# EAGLE board Garoa_Dojo_Shield (EAGLE 6.2)
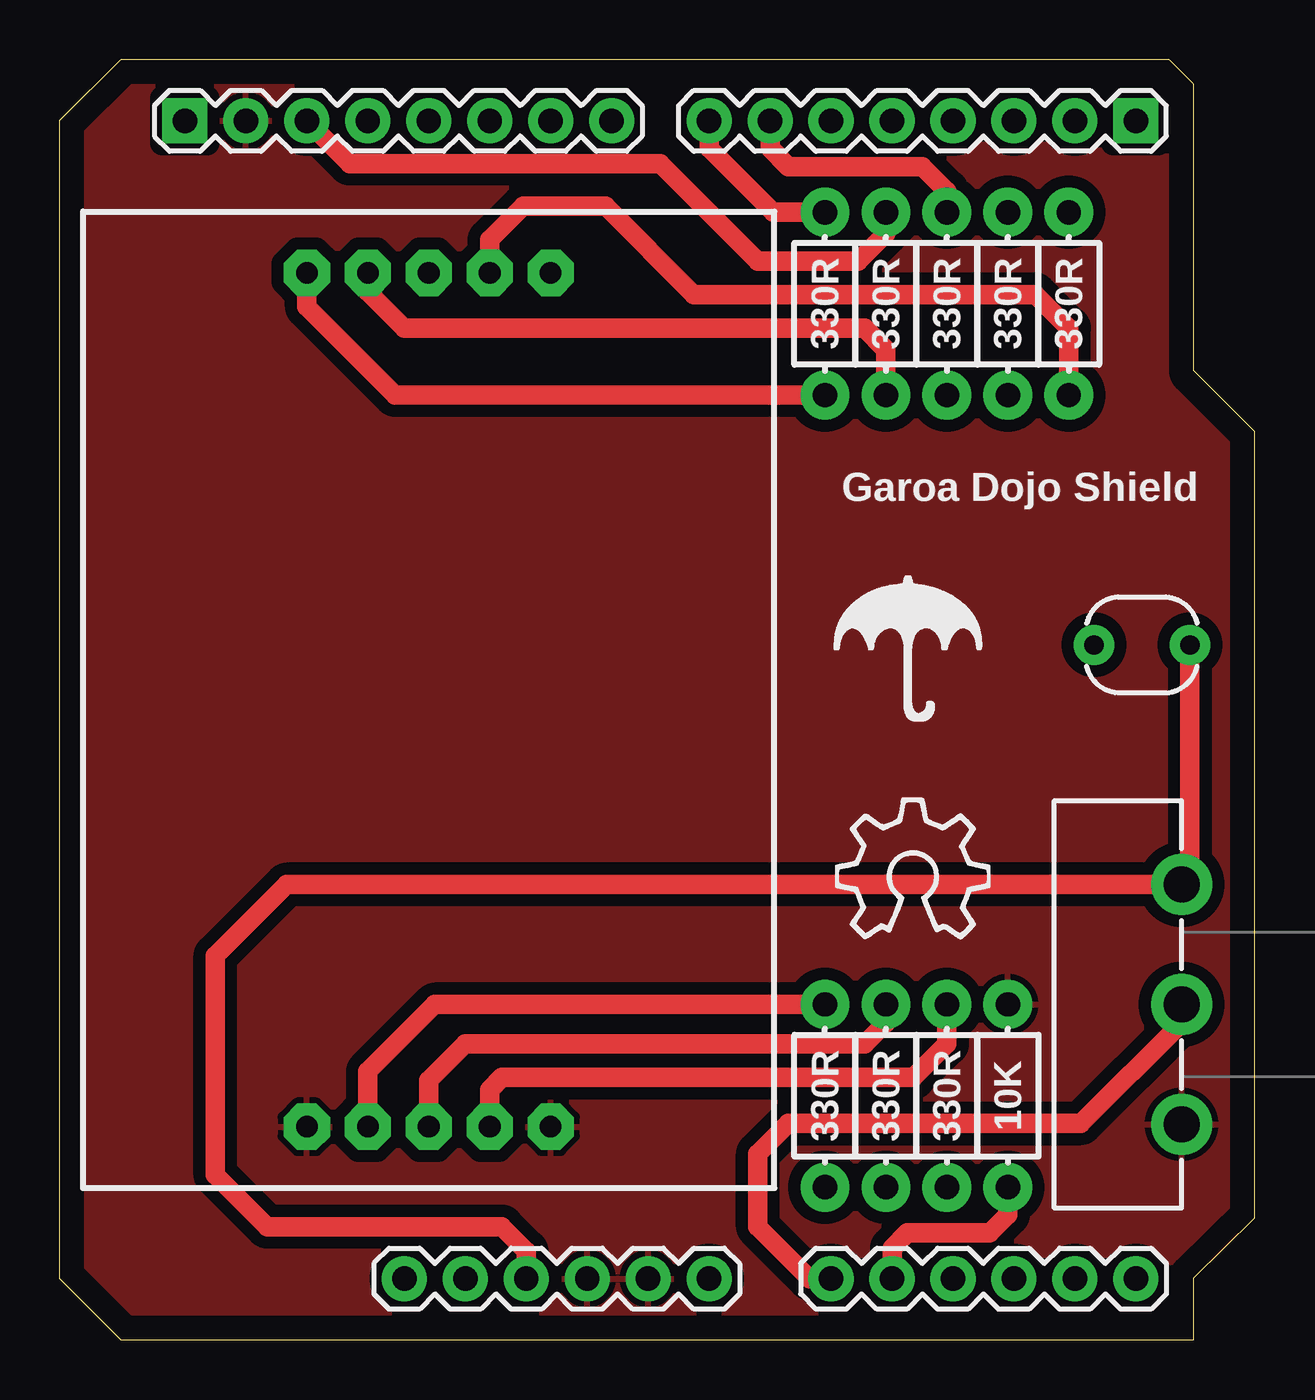
[diagram p0: board, top side]
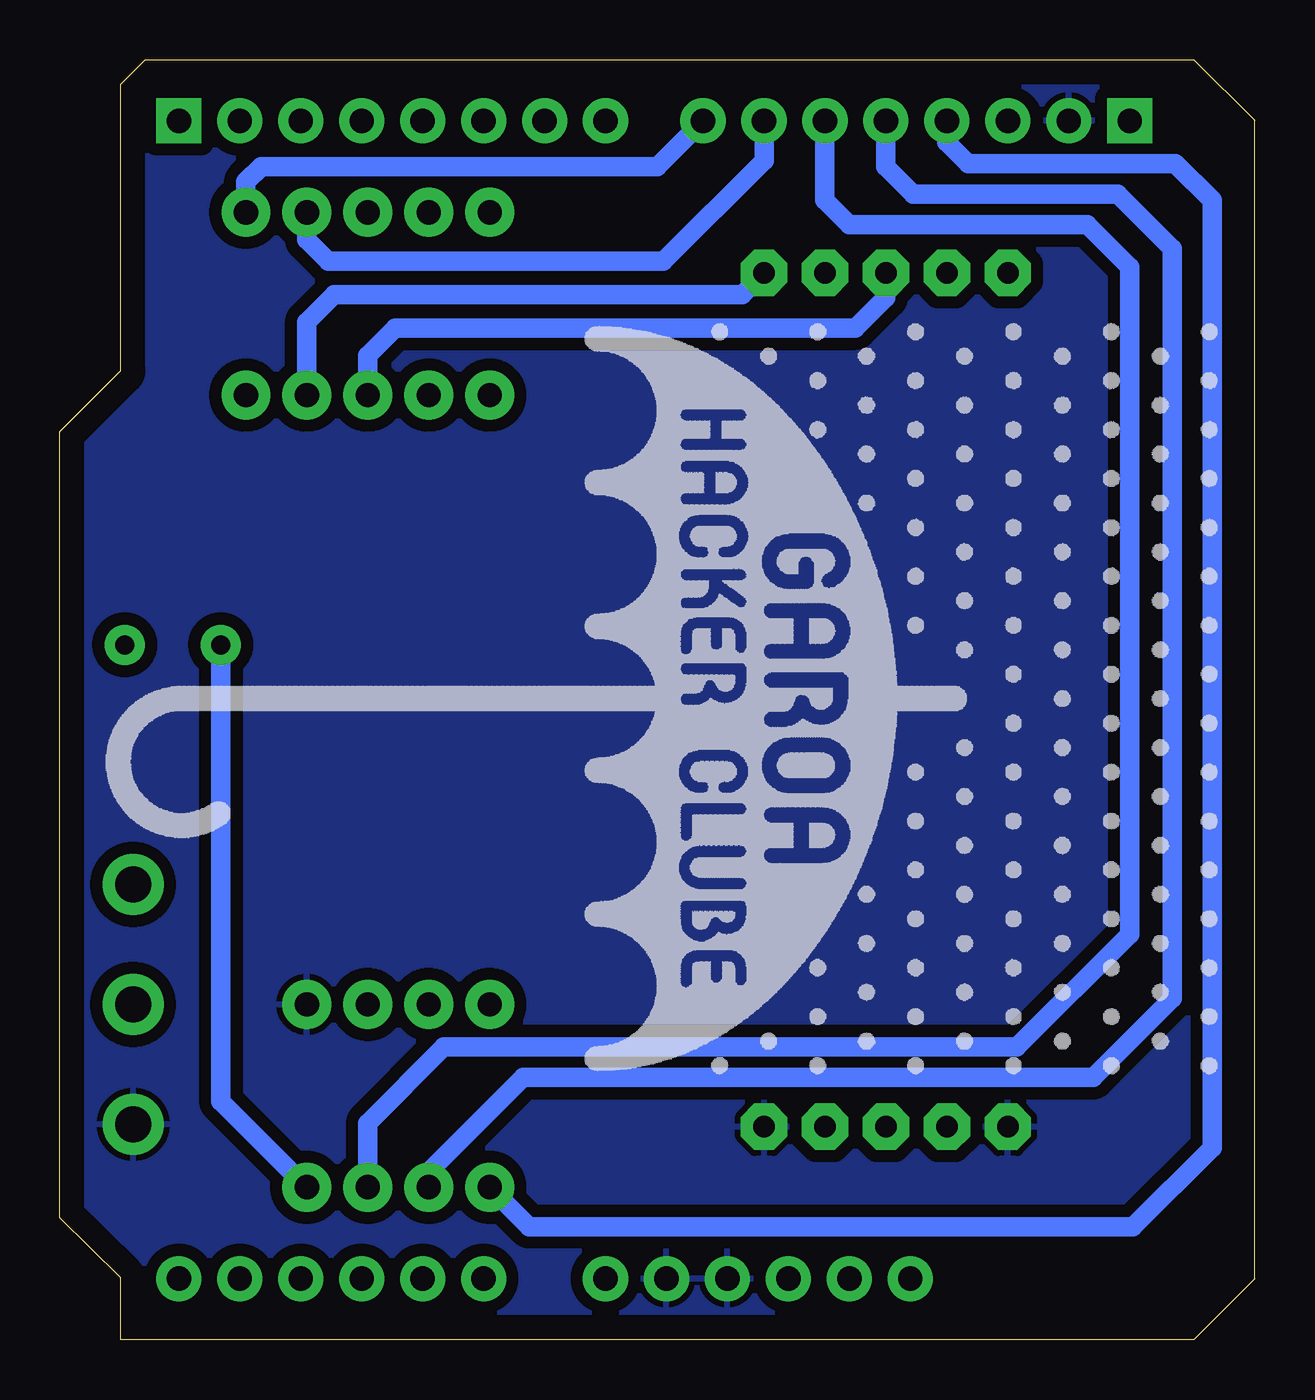
[diagram p1: board, bottom side, seen from below]

Size 49.78 x 53.34 mm. Coordinates in mm from the lower left corner, seen from the top.
Outline: 47.24,0 47.24,2.56 49.78,5.08 49.78,37.85 47.24,40.39 47.24,52.32 46.23,53.34 2.54,53.34 0,50.83 0,2.54 2.54,0 47.24,0
Copper layers (1*16): Top 0.035mm / dielectric 1.5mm / Bottom 0.035mm
Design rules: minimum track width 10mil, minimum drill 24mil, track to track 8mil, track to pad 8mil, pad to pad 8mil, via to via 8mil, smd to smd 8mil, copper to edge 40mil, drill to drill 8mil, minimum pad ring 10mil, minimum via ring 8mil, stop-mask expansion 4mil, vias tented up to drill 0mil, thermal gap 10mil

## Footprints (pad centres in the part's own frame; a part is rotated, then mirrored left to right if it is on the bottom)
1X06 = drill 1.016 pad 1.88: 1 0,0; 2 2.54,0; 3 5.08,0; 4 7.62,0; 5 10.16,0; 6 12.7,0
1X08 = drill 1.016 pad 1.88 square: 1 0,0 | drill 1.016 pad 1.88: 2 2.54,0; 3 5.08,0; 4 7.62,0; 5 10.16,0; 6 12.7,0; 7 15.24,0; 8 17.78,0
PHOTOCELL = drill 0.8 pad 1.676: 1 -2,0; 2 2,0
AXIAL-0.3-KIT = drill 1.016 pad 2.032: P$1 -3.81,0; P$2 3.81,0
POT_ALPHA_RV16AF-20 = drill 1.5 pad 2.54: 1 -5,0; 2 0,0; 3 5,0
7SEG-CODINGDOJO = drill 0.9 pad 1.93 octagon: A 2.54,17.8; B 5.08,17.8; C 2.54,-17.8; D 0,-17.8; DP 0,17.8; E -2.54,-17.8; F -2.54,17.8; G -5.08,17.8; GNDDIR 5.08,-17.8; GNDESQ -5.08,-17.8

## Placement (x,y rotation side)
AD  [1X06]  32.13,2.54 0 top
AD1  [1X06]  14.35,2.54 0 top
IOL  [1X08]  44.83,50.8 180 top
JP1  [1X08]  5.21,50.8 0 top
R1  LDR  [PHOTOCELL]  45.09,28.96 0 top
R2  330R  [AXIAL-0.3-KIT]  31.88,43.18 90 top
R3  330R  [AXIAL-0.3-KIT]  34.42,43.18 90 top
R4  330R  [AXIAL-0.3-KIT]  36.96,43.18 90 top
R5  330R  [AXIAL-0.3-KIT]  42.04,43.18 90 top
R6  330R  [AXIAL-0.3-KIT]  39.5,43.18 90 top
R7  330R  [AXIAL-0.3-KIT]  36.96,10.16 90 top
R8  330R  [AXIAL-0.3-KIT]  34.42,10.16 90 top
R9  330R  [AXIAL-0.3-KIT]  31.88,10.16 90 top
R10  100K  [AXIAL-0.3-KIT]  39.5,10.16 90 top
U$1  10K  [POT_ALPHA_RV16AF-20]  46.74,13.97 90 top
U$2  7SEG-CODINGDOJO  [7SEG-CODINGDOJO]  15.37,26.67 0 top
U$3  [LDG-15MM]  15.37,4.57 0 top

## Library data of the parts
AD AD1 IOL = SparkFun
JP1 = SparkFun-Connectors
R1 = SparkFun-Sensors
R2-R10 = SparkFun-Resistors
U$1 = SparkFun-Electromechanical
U$2 = 7segCodingDojo
U$3 = LdG-library

## Nets
+3.3V: AD1.2
A0/POT: AD.1 U$1.2
A1/LDR: AD.2 R1.1 R10.P$1
A2: AD.3
A3: AD.4
A4: AD.5
A5: AD.6
D0: IOL.1
D1: IOL.2
D2: IOL.3
D3: IOL.4
D4: IOL.5
D5: IOL.6
D6/DP: IOL.7 R4.P$2
D7/G: IOL.8 R2.P$2
D8/A: JP1.8 R5.P$2
D9/B: JP1.7 R6.P$2
D10/C: JP1.6 R7.P$1
D11/D: JP1.5 R8.P$1
D12/E: JP1.4 R9.P$1
D13/F: JP1.3 R3.P$2
GND: AD1.4 AD1.5 JP1.2 R10.P$2 U$1.1 U$2.GNDDIR U$2.GNDESQ
N$2: R9.P$2 U$2.E
N$3: R8.P$2 U$2.D
N$4: R7.P$2 U$2.C
N$5: R2.P$1 U$2.G
N$7: R3.P$1 U$2.F
N$8: R4.P$1 U$2.DP
N$9: R5.P$1 U$2.A
N$10: R6.P$1 U$2.B
RST: AD1.1
VCC: AD1.3 R1.2 U$1.3
VIN: AD1.6

## Tracks (layer width: path | path; a pad name or v marks a point on that pad's centre or on a via)
A0/POT
  Top 0.813: AD.1 31.24,2.54 29.08,4.7 29.08,7.75 30.35,9.02 42.55,9.02 46.74,13.21 U$1.2
A1/LDR
  Top 0.813: R10.P$1 39.5,5.21 38.73,4.45 35.31,4.45 34.67,3.81 AD.2
  Bottom 0.813: R1.1 43.09,9.94 R10.P$1
D6/DP
  Top 0.813: R4.P$2 36.96,47.88 35.94,48.9 30.35,48.9 29.59,49.66 IOL.7
D7/G
  Top 0.813: R2.P$2 29.72,46.99 27.05,49.66 IOL.8
D8/A
  Bottom 0.813: R5.P$2 42.04,48.26 41.4,48.9 24.89,48.9 JP1.8
D9/B
  Bottom 0.813: R6.P$2 39.5,45.85 38.61,44.96 24.64,44.96 20.45,49.15 JP1.7
D10/C
  Bottom 0.813: JP1.6 17.91,47.5 16.89,46.48 6.99,46.48 5.21,44.7 5.21,16.89 9.91,12.19 33.78,12.19 36.96,9.02 R7.P$1
D11/D
  Bottom 0.813: R8.P$1 34.42,6.99 30.48,10.92 6.73,10.92 3.43,14.22 3.43,45.47 5.71,47.75 14.22,47.75 15.37,48.9 JP1.5
D12/E
  Bottom 0.813: JP1.4 12.83,49.91 11.94,49.02 3.3,49.02 1.78,47.5 1.78,8 5.08,4.7 30.23,4.7 R9.P$1
D13/F
  Top 0.813: R3.P$2 34.42,46.1 33.27,44.96 29.08,44.96 25.02,49.02 12.06,49.02 JP1.3
GND
  pour Bottom (isolate 0.508): 0,0 49.91,0 49.91,53.34 0,53.34
  pour Top (isolate 0.508): 0,0 49.91,0 49.91,53.34 0,53.34
N$2
  Top 0.813: R9.P$2 15.62,13.97 12.83,11.18 U$2.E
N$3
  Top 0.813: U$2.D 15.37,10.79 16.89,12.32 33.53,12.32 34.42,13.21 R8.P$2
N$4
  Top 0.813: U$2.C 17.91,10.41 18.41,10.92 35.56,10.92 36.96,12.32 R7.P$2
N$5
  Top 0.813: R2.P$1 13.97,39.37 10.29,43.05 U$2.G
N$7
  Top 0.813: R3.P$1 34.42,41.27 33.53,42.16 14.35,42.16 12.83,43.69 U$2.F
N$8
  Bottom 0.813: R4.P$1 36.96,41.02 35.81,42.16 16.64,42.16 15.37,43.43 U$2.DP
N$9
  Top 0.813: R5.P$1 42.04,42.16 40.64,43.56 26.42,43.56 22.73,47.24 19.3,47.24 17.91,45.85 U$2.A
N$10
  Bottom 0.813: R6.P$1 39.5,42.42 38.35,43.56 21.36,43.56 U$2.B
VCC
  Top 0.813: AD1.3 19.43,3.68 18.41,4.7 8.64,4.7 6.48,6.86 6.48,16 9.45,18.97 U$1.3 47.09,19.32 R1.2

## Text on the board
tNames: 330R | 330R | 330R | 330R | 330R | Garoa Dojo Shield | 330R | 330R | 330R | 10K